# Altium PCB Glove_Row.PcbDoc (part 2 of 2)
Units mm, origin at the board's own origin, x right, y up, seen from the top; angles counter-clockwise.
Board outline 47.7 x 64 mm, 2 copper layers (Top Layer, Bottom Layer); 61 components, 194 nets, 577 pads, 247 vias.
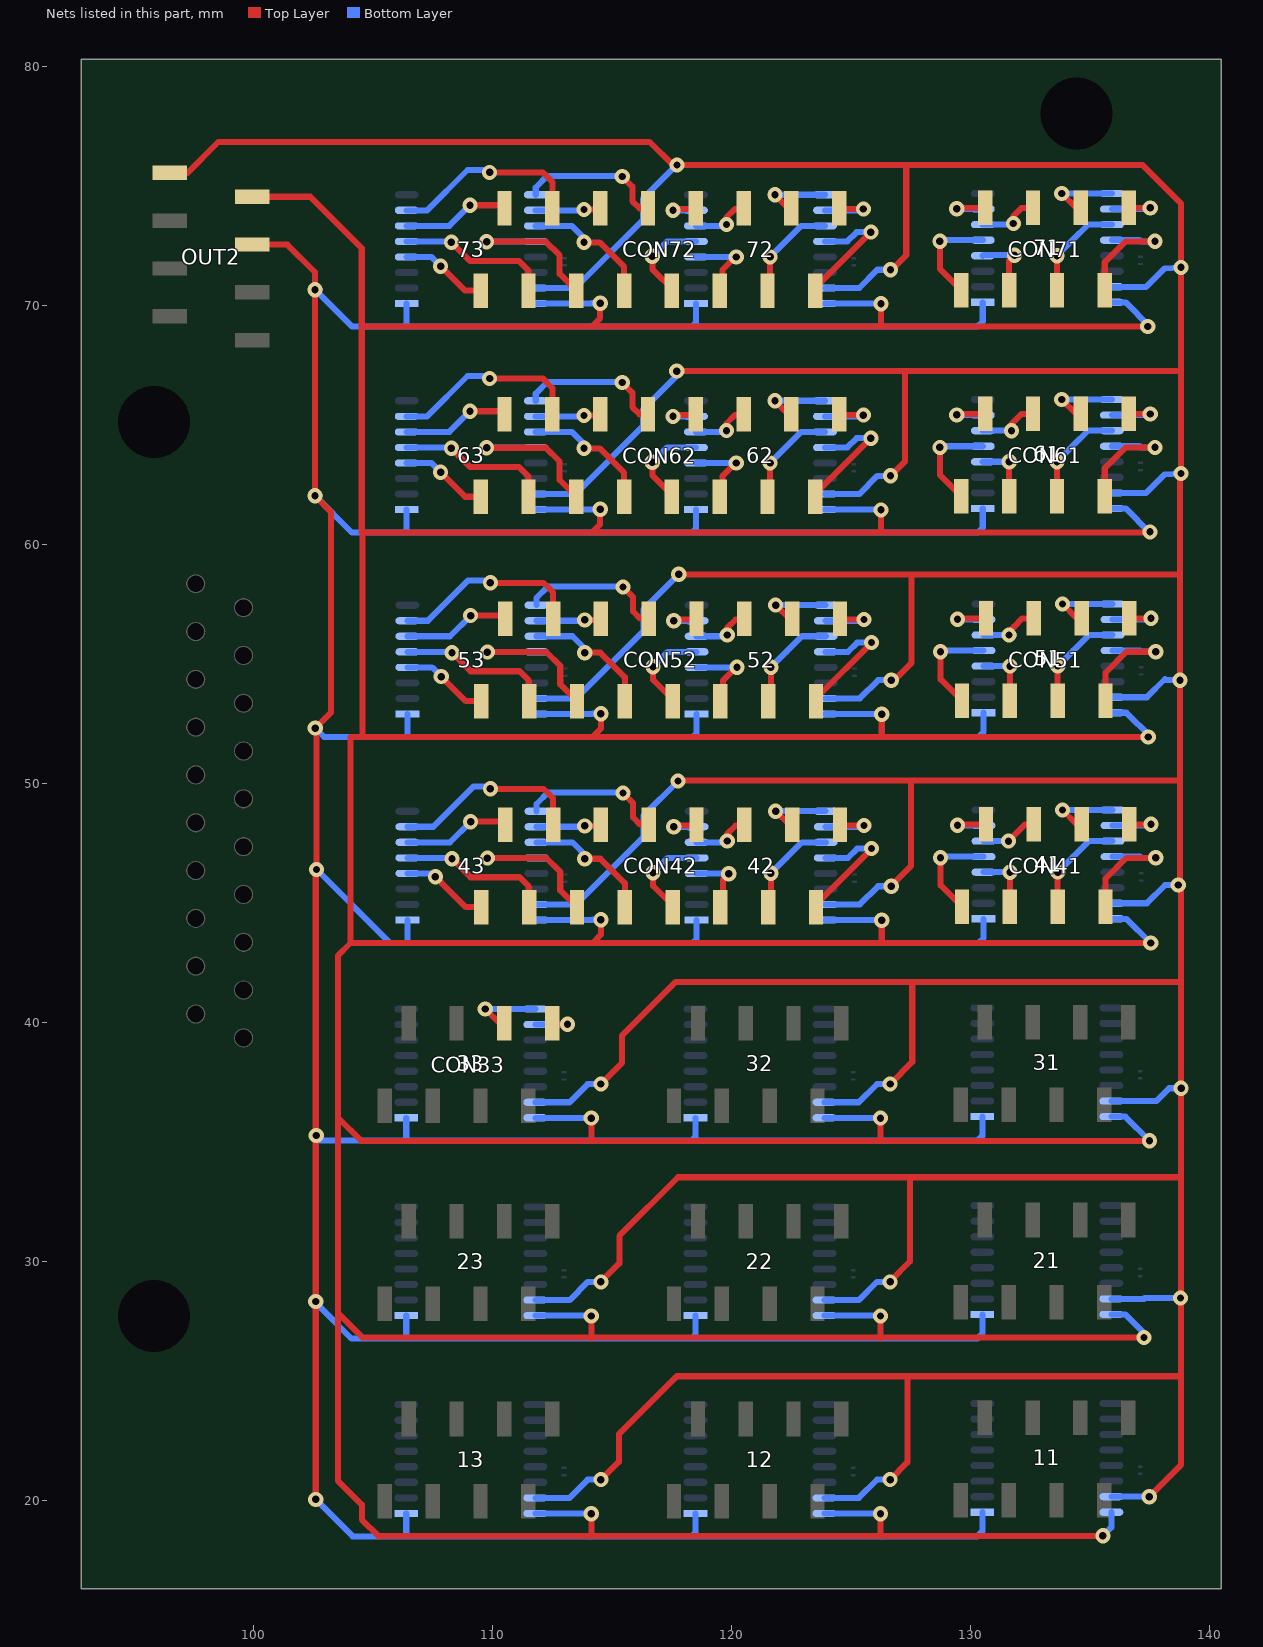
[diagram p2: the nets of this part, all layers, seen from the top]

## Via types
v1: diameter 0.635, hole 0.305, Top Layer to Bottom Layer, 247 vias

## Nets (pads, with @x,y where several pads share a name; then routed paths per layer and width w, separated by ;. In a path a pad name is that pad's centre, name@x,y a point inside that pad or via, vN(x,y) a via of type N, cw(c..) or ccw(c..) an arc to the next point about the centre after c; other vN are vias at no path point) (continued)
R337: 33.10 CON33.1 | length 2.4
  Top Layer w0.254: CON33.1@112.506,39.961 112.546,39.921 v1(113.146,39.921)
  Bottom Layer w0.254: 33.10@111.802,39.909 113.33,39.909 113.342,39.921 v1(113.146,39.921)
R338: 33.9 CON33.3 | length 3.1
  Top Layer w0.254: v1(109.706,40.561) 110.306,39.961 CON33.3@110.506,39.961
  Bottom Layer w0.254: v1(109.706,40.561) 33.9@111.8,40.561
R411: 41.4 CON41.6 | length 2.6
  Top Layer w0.254: v1@131.656,46.282 CON41.6@131.656,44.836 CON41.6@131.706,44.886
  Bottom Layer w0.254: 41.4@130.552,46.284 v1(131.658,46.284)
R412: 41.5 CON41.8 | length 4.2
  Top Layer w0.254: v1(128.756,46.886) 128.756,45.736 CON41.8@129.656,44.836
  Bottom Layer w0.254: v1(128.756,46.886) 128.804,46.934 41.5@130.552,46.934
R413: 41.6 CON41.5 | length 2.5
  Top Layer w0.254: v1@131.596,47.701 v1(131.596,47.584) 132.298,48.286 CON41.5@132.656,48.286
  Bottom Layer w0.254: 41.6@130.552,47.584 v1(131.596,47.584)
R414: 41.7 CON41.7 | length 2.3
  Top Layer w0.254: v1@129.466,48.286 CON41.7@130.656,48.286
  Bottom Layer w0.254: v1@129.466,48.234 41.7@130.552,48.234
  other v1: 129.466,48.246
R415: 41.12 CON41.2 | length 5.5
  Top Layer w0.254: CON41.2@135.656,44.836 135.656,46.016 136.526,46.886 v1(137.756,46.886)
  Bottom Layer w0.254: 41.12@135.952,46.934 137.108,46.934 137.156,46.886 v1(137.756,46.886)
R416: 41.11 CON41.4 | length 4.3
  Top Layer w0.254: CON41.4@133.656,44.836 v1(133.656,46.286)
  Bottom Layer w0.254: v1(133.656,46.286) 134.304,46.934 134.954,47.584 41.11@135.952,47.584
R417: 41.10 CON41.1 | length 2.5
  Top Layer w0.254: CON41.1@136.656,48.286 v1(137.556,48.286)
  Bottom Layer w0.254: 41.10@135.952,48.234 137.504,48.234 v1(137.556,48.286)
R418: 41.9 CON41.3 | length 3.1
  Top Layer w0.254: v1(133.856,48.886) 134.456,48.286 CON41.3@134.656,48.286
  Bottom Layer w0.254: v1(133.856,48.886) 41.9@135.952,48.884
R421: 42.4 CON42.6 | length 3
  Top Layer w0.254: CON42.6@119.706,44.836 119.656,44.786 119.656,45.981 v1(119.896,46.221)
  Bottom Layer w0.254: 42.4@118.552,46.234 118.565,46.221 v1(119.896,46.221)
R422: 42.5 CON42.8 | length 3.9
  Top Layer w0.254: v1(116.726,46.261) 116.726,45.716 CON42.8@117.656,44.786
  Bottom Layer w0.254: v1(116.726,46.261) 117.349,46.884 42.5@118.552,46.884
R423: 42.6 CON42.5 | length 2.5
  Top Layer w0.254: v1(119.831,47.586) 119.831,47.886 120.181,48.236 CON42.5@120.656,48.236
  Bottom Layer w0.254: 42.6@118.552,47.534 v1@119.831,47.534
R424: 42.7 CON42.7 | length 2.3
  Top Layer w0.254: v1@117.466,48.236 CON42.7@118.656,48.236
  Bottom Layer w0.254: v1@117.466,48.184 42.7@118.552,48.184
  other v1: 117.596,48.184
R425: 42.12 CON42.2 | length 5.5
  Top Layer w0.254: CON42.2@123.656,44.786 123.656,45.056 v1(125.871,47.271)
  Bottom Layer w0.254: 42.12@123.952,46.884 124.884,46.884 125.271,47.271 v1(125.871,47.271)
R426: 42.11 CON42.4 | length 4.3
  Top Layer w0.254: CON42.4@121.656,44.786 v1(121.656,46.236)
  Bottom Layer w0.254: v1(121.656,46.236) 122.304,46.884 122.954,47.534 42.11@123.952,47.534
R427: 42.10 CON42.1 | length 2.5
  Top Layer w0.254: CON42.1@124.656,48.236 v1(125.556,48.236)
  Bottom Layer w0.254: 42.10@123.952,48.184 125.504,48.184 v1(125.556,48.236)
R428: 42.9 CON42.3 | length 3.1
  Top Layer w0.254: v1(121.856,48.836) 122.456,48.236 CON42.3@122.656,48.236
  Bottom Layer w0.254: v1(121.856,48.836) 42.9@123.95,48.836
R431: 43.4 CON42.16 | length 3.3
  Top Layer w0.254: 107.871,45.846 108.896,44.821 CON42.16@109.546,44.821
  Bottom Layer w0.254: 43.4@106.452,46.234 107.483,46.234 v1(107.621,46.096)
R432: 43.5 CON42.14 | length 6.4
  Top Layer w0.254: v1(108.321,46.847) 109.097,46.071 111.146,46.071 111.546,45.671 CON42.14@111.546,44.821
  Bottom Layer w0.254: 43.5@106.452,46.884 108.284,46.884 v1(108.321,46.847)
R433: 43.6 CON42.15 | length 4.5
  Top Layer w0.254: v1(109.096,48.396) 110.421,48.396 CON42.15@110.546,48.271
  Bottom Layer w0.254: 43.6@106.452,47.534 108.234,47.534 v1(109.096,48.396)
R434: 43.7 CON42.13 | length 8.1
  Top Layer w0.254: v1(109.921,49.771) 112.146,49.771 112.546,49.371 CON42.13@112.546,48.271
  Bottom Layer w0.254: 43.7@106.452,48.184 107.534,48.184 109.221,49.871 109.821,49.871 v1(109.921,49.771)
R435: 43.12 CON42.12 | length 7.4
  Top Layer w0.254: v1(109.796,46.871) 112.271,46.871 112.846,46.296 112.846,45.521 CON42.12@113.546,44.821 CON42.12@113.546,45.146
  Bottom Layer w0.254: v1(109.796,46.871) 109.809,46.884 43.12@111.852,46.884
R436: 43.11 CON42.10 | length 5.7
  Top Layer w0.254: v1(113.871,46.846) 114.521,46.846 115.546,45.821 CON42.10@115.546,44.821
  Bottom Layer w0.254: 43.11@111.852,47.534 113.358,47.534 113.996,46.896 113.946,46.846 v1(113.871,46.846)
R437: 43.10 CON42.11 | length 2.7
  Top Layer w0.254: v1(113.871,48.221) 114.496,48.221 CON42.11@114.546,48.271
  Bottom Layer w0.254: 43.10@111.852,48.184 113.834,48.184 v1(113.871,48.221)
R438: 43.9 CON42.9 | length 6.1
  Top Layer w0.254: v1(115.471,49.596) 115.896,49.171 115.896,48.571 116.196,48.271 CON42.9@116.546,48.271
  Bottom Layer w0.254: 43.9@111.852,48.834 111.852,49.137 112.336,49.621 115.446,49.621 v1(115.471,49.596)
R511: 51.4 CON51.6 | length 2.6
  Top Layer w0.254: v1@131.656,54.902 CON51.6@131.656,53.456 CON51.6@131.706,53.506
  Bottom Layer w0.254: 51.4@130.552,54.904 v1(131.658,54.904)
R512: 51.5 CON51.8 | length 4.2
  Top Layer w0.254: v1(128.756,55.506) 128.756,54.356 CON51.8@129.656,53.456
  Bottom Layer w0.254: v1(128.756,55.506) 128.804,55.554 51.5@130.552,55.554
R513: 51.6 CON51.5 | length 2.7
  Top Layer w0.254: v1(131.621,56.204) 131.621,56.346 131.721,56.446 131.831,56.556 132.181,56.906 CON51.5@132.656,56.906
  Bottom Layer w0.254: 51.6@130.552,56.204 v1@131.831,56.204
R514: 51.7 CON51.7 | length 2.3
  Top Layer w0.254: v1@129.466,56.906 CON51.7@130.656,56.906
  Bottom Layer w0.254: v1@129.466,56.854 51.7@130.552,56.854
  other v1: 129.466,56.866
R515: 51.12 CON51.2 | length 5.5
  Top Layer w0.254: CON51.2@135.656,53.456 135.656,54.636 136.526,55.506 v1(137.756,55.506)
  Bottom Layer w0.254: 51.12@135.952,55.554 137.108,55.554 137.156,55.506 v1(137.756,55.506)
R516: 51.11 CON51.4 | length 4.3
  Top Layer w0.254: CON51.4@133.656,53.456 v1(133.656,54.906)
  Bottom Layer w0.254: v1(133.656,54.906) 134.304,55.554 134.954,56.204 51.11@135.952,56.204
R517: 51.10 CON51.1 | length 2.5
  Top Layer w0.254: CON51.1@136.656,56.906 v1(137.556,56.906)
  Bottom Layer w0.254: 51.10@135.952,56.854 137.504,56.854 v1(137.556,56.906)
R518: 51.9 CON51.3 | length 3.1
  Top Layer w0.254: v1(133.856,57.506) 134.456,56.906 CON51.3@134.656,56.906
  Bottom Layer w0.254: v1(133.856,57.506) 51.9@135.95,57.506
R521: 52.4 CON52.6 | length 3.5
  Top Layer w0.254: CON52.6@119.706,53.456 119.656,53.406 119.656,54.306 v1@120.221,54.871
  Bottom Layer w0.254: 52.4@118.552,54.854 v1(120.241,54.854)
R522: 52.5 CON52.8 | length 3.9
  Top Layer w0.254: v1(116.726,54.881) 116.726,54.336 CON52.8@117.656,53.406
  Bottom Layer w0.254: v1(116.726,54.881) 117.349,55.504 52.5@118.552,55.504
R523: 52.6 CON52.5 | length 2.5
  Top Layer w0.254: v1(119.831,56.206) 119.831,56.506 120.181,56.856 CON52.5@120.656,56.856
  Bottom Layer w0.254: 52.6@118.552,56.154 v1@119.831,56.154
R524: 52.7 CON52.7 | length 2.3
  Top Layer w0.254: v1@117.466,56.856 CON52.7@118.656,56.856
  Bottom Layer w0.254: v1@117.466,56.804 52.7@118.552,56.804
  other v1: 117.596,56.804
R525: 52.12 CON52.2 | length 5.5
  Top Layer w0.254: CON52.2@123.656,53.406 123.656,53.676 v1(125.871,55.891)
  Bottom Layer w0.254: 52.12@123.952,55.504 124.884,55.504 125.271,55.891 v1(125.871,55.891)
R526: 52.11 CON52.4 | length 4.3
  Top Layer w0.254: CON52.4@121.656,53.406 v1(121.656,54.856)
  Bottom Layer w0.254: v1(121.656,54.856) 122.304,55.504 122.954,56.154 52.11@123.952,56.154
R527: 52.10 CON52.1 | length 2.5
  Top Layer w0.254: CON52.1@124.656,56.856 v1(125.556,56.856)
  Bottom Layer w0.254: 52.10@123.952,56.804 125.504,56.804 v1(125.556,56.856)
R528: 52.9 CON52.3 | length 3.1
  Top Layer w0.254: v1(121.856,57.456) 122.456,56.856 CON52.3@122.656,56.856
  Bottom Layer w0.254: v1(121.856,57.456) 52.9@123.95,57.456
R531: 53.4 CON52.16 | length 3.7
  Top Layer w0.254: v1(107.871,54.466) 108.896,53.441 CON52.16@109.546,53.441
  Bottom Layer w0.254: 53.4@106.452,54.854 107.483,54.854 v1(107.871,54.466)
R532: 53.5 CON52.14 | length 6.4
  Top Layer w0.254: v1(108.321,55.467) 109.097,54.691 111.146,54.691 111.546,54.291 CON52.14@111.546,53.441
  Bottom Layer w0.254: 53.5@106.452,55.504 108.284,55.504 v1(108.321,55.467)
R533: 53.6 CON52.15 | length 4.5
  Top Layer w0.254: v1(109.096,57.016) 110.421,57.016 CON52.15@110.546,56.891
  Bottom Layer w0.254: 53.6@106.452,56.154 108.234,56.154 v1(109.096,57.016)
R534: 53.7 CON52.13 | length 8.1
  Top Layer w0.254: v1(109.921,58.391) 112.146,58.391 112.546,57.991 CON52.13@112.546,56.891
  Bottom Layer w0.254: 53.7@106.452,56.804 107.309,56.804 108.996,58.491 109.821,58.491 v1(109.921,58.391)
R535: 53.12 CON52.12 | length 7.4
  Top Layer w0.254: v1(109.796,55.491) 112.271,55.491 112.846,54.916 112.846,54.141 CON52.12@113.546,53.441 CON52.12@113.546,53.766
  Bottom Layer w0.254: v1(109.796,55.491) 109.809,55.504 53.12@111.852,55.504
R536: 53.11 CON52.10 | length 5.7
  Top Layer w0.254: v1(113.871,55.466) 114.521,55.466 115.546,54.441 CON52.10@115.546,53.441
  Bottom Layer w0.254: 53.11@111.852,56.154 113.358,56.154 113.996,55.516 113.946,55.466 v1(113.871,55.466)
R537: 53.10 CON52.11 | length 2.7
  Top Layer w0.254: v1(113.871,56.841) 114.496,56.841 CON52.11@114.546,56.891
  Bottom Layer w0.254: 53.10@111.852,56.804 113.834,56.804 v1(113.871,56.841)
R538: 53.9 CON52.9 | length 6.1
  Top Layer w0.254: v1(115.471,58.216) 115.896,57.791 115.896,57.191 116.196,56.891 CON52.9@116.546,56.891
  Bottom Layer w0.254: 53.9@111.852,57.454 111.852,57.757 112.336,58.241 115.446,58.241 v1(115.471,58.216)
R611: 61.4 CON61.6 | length 2.6
  Top Layer w0.254: v1@131.626,63.452 CON61.6@131.626,62.006 CON61.6@131.676,62.056
  Bottom Layer w0.254: 61.4@130.522,63.454 v1(131.628,63.454)
R612: 61.5 CON61.8 | length 4.2
  Top Layer w0.254: v1(128.726,64.056) 128.726,62.906 CON61.8@129.626,62.006
  Bottom Layer w0.254: v1(128.726,64.056) 128.774,64.104 61.5@130.522,64.104
R613: 61.6 CON61.5 | length 2.6
  Top Layer w0.254: v1(131.721,64.754) 131.721,65.026 131.801,65.106 132.151,65.456 CON61.5@132.626,65.456
  Bottom Layer w0.254: 61.6@130.522,64.754 v1@131.801,64.754
R614: 61.7 CON61.7 | length 2.3
  Top Layer w0.254: v1@129.436,65.456 CON61.7@130.626,65.456
  Bottom Layer w0.254: v1@129.436,65.404 61.7@130.522,65.404
  other v1: 129.436,65.416
R615: 61.12 CON61.2 | length 5.5
  Top Layer w0.254: CON61.2@135.626,62.006 135.626,63.186 136.496,64.056 v1(137.726,64.056)
  Bottom Layer w0.254: 61.12@135.922,64.104 137.078,64.104 137.126,64.056 v1(137.726,64.056)
R616: 61.11 CON61.4 | length 4.3
  Top Layer w0.254: CON61.4@133.626,62.006 v1(133.626,63.456)
  Bottom Layer w0.254: v1(133.626,63.456) 134.274,64.104 134.924,64.754 61.11@135.922,64.754
R617: 61.10 CON61.1 | length 2.5
  Top Layer w0.254: CON61.1@136.626,65.456 v1(137.526,65.456)
  Bottom Layer w0.254: 61.10@135.922,65.404 137.474,65.404 v1(137.526,65.456)
R618: 61.9 CON61.3 | length 3.1
  Top Layer w0.254: v1(133.826,66.056) 134.426,65.456 CON61.3@134.626,65.456
  Bottom Layer w0.254: v1(133.826,66.056) 61.9@135.92,66.056
R621: 62.4 CON62.6 | length 3.5
  Top Layer w0.254: CON62.6@119.676,62.006 119.626,61.956 119.626,62.851 v1@120.196,63.421
  Bottom Layer w0.254: 62.4@118.522,63.404 v1(120.211,63.404)
R622: 62.5 CON62.8 | length 3.9
  Top Layer w0.254: v1(116.696,63.431) 116.696,62.886 CON62.8@117.626,61.956
  Bottom Layer w0.254: v1(116.696,63.431) 117.319,64.054 62.5@118.522,64.054
R623: 62.6 CON62.5 | length 2.5
  Top Layer w0.254: v1(119.801,64.756) 119.801,65.056 120.151,65.406 CON62.5@120.626,65.406
  Bottom Layer w0.254: 62.6@118.522,64.704 v1@119.801,64.704
R624: 62.7 CON62.7 | length 2.3
  Top Layer w0.254: v1@117.436,65.406 CON62.7@118.626,65.406
  Bottom Layer w0.254: v1@117.436,65.354 62.7@118.522,65.354
  other v1: 117.566,65.354
R625: 62.12 CON62.2 | length 5.5
  Top Layer w0.254: CON62.2@123.626,61.956 123.626,62.226 v1(125.841,64.441)
  Bottom Layer w0.254: 62.12@123.922,64.054 124.854,64.054 125.241,64.441 v1(125.841,64.441)
R626: 62.11 CON62.4 | length 4.3
  Top Layer w0.254: CON62.4@121.626,61.956 v1(121.626,63.406)
  Bottom Layer w0.254: v1(121.626,63.406) 122.274,64.054 122.924,64.704 62.11@123.922,64.704
R627: 62.10 CON62.1 | length 2.5
  Top Layer w0.254: CON62.1@124.626,65.406 v1(125.526,65.406)
  Bottom Layer w0.254: 62.10@123.922,65.354 125.474,65.354 v1(125.526,65.406)
R628: 62.9 CON62.3 | length 3.1
  Top Layer w0.254: v1(121.826,66.006) 122.426,65.406 CON62.3@122.626,65.406
  Bottom Layer w0.254: v1(121.826,66.006) 62.9@123.92,66.006
R631: 63.4 CON62.16 | length 3.7
  Top Layer w0.254: v1(107.841,63.016) 108.866,61.991 CON62.16@109.516,61.991
  Bottom Layer w0.254: 63.4@106.422,63.404 107.453,63.404 v1(107.841,63.016)
R632: 63.5 CON62.14 | length 6.4
  Top Layer w0.254: v1(108.291,64.017) 109.067,63.241 111.116,63.241 111.516,62.841 CON62.14@111.516,61.991
  Bottom Layer w0.254: 63.5@106.422,64.054 108.254,64.054 v1(108.291,64.017)
R633: 63.6 CON62.15 | length 4.5
  Top Layer w0.254: v1(109.066,65.566) 110.391,65.566 CON62.15@110.516,65.441
  Bottom Layer w0.254: 63.6@106.422,64.704 108.204,64.704 v1(109.066,65.566)
R634: 63.7 CON62.13 | length 8.1
  Top Layer w0.254: v1(109.891,66.941) 112.116,66.941 112.516,66.541 CON62.13@112.516,65.441
  Bottom Layer w0.254: 63.7@106.422,65.354 107.279,65.354 108.966,67.041 109.791,67.041 v1(109.891,66.941)
R635: 63.12 CON62.12 | length 7.4
  Top Layer w0.254: v1(109.766,64.041) 112.241,64.041 112.816,63.466 112.816,62.691 CON62.12@113.516,61.991 CON62.12@113.516,62.316
  Bottom Layer w0.254: v1(109.766,64.041) 109.779,64.054 63.12@111.822,64.054
R636: 63.11 CON62.10 | length 5.7
  Top Layer w0.254: v1(113.841,64.016) 114.491,64.016 115.516,62.991 CON62.10@115.516,61.991
  Bottom Layer w0.254: 63.11@111.822,64.704 113.328,64.704 113.966,64.066 113.916,64.016 v1(113.841,64.016)
R637: 63.10 CON62.11 | length 2.7
  Top Layer w0.254: v1(113.841,65.391) 114.466,65.391 CON62.11@114.516,65.441
  Bottom Layer w0.254: 63.10@111.822,65.354 113.804,65.354 v1(113.841,65.391)
R638: 63.9 CON62.9 | length 6.1
  Top Layer w0.254: v1(115.441,66.766) 115.866,66.341 115.866,65.741 116.166,65.441 CON62.9@116.516,65.441
  Bottom Layer w0.254: 63.9@111.822,66.004 111.822,66.307 112.306,66.791 115.416,66.791 v1(115.441,66.766)
R711: 71.4 CON71.6 | length 3
  Top Layer w0.254: CON71.6@131.676,70.676 CON71.6@131.626,70.626 131.626,71.876 v1(131.846,72.096)
  Bottom Layer w0.254: 71.4@130.522,72.074 130.544,72.096 v1(131.846,72.096)
R712: 71.5 CON71.8 | length 4.2
  Top Layer w0.254: v1(128.726,72.676) 128.726,71.526 CON71.8@129.626,70.626
  Bottom Layer w0.254: v1(128.726,72.676) 128.774,72.724 71.5@130.522,72.724
R713: 71.6 CON71.5 | length 2.5
  Top Layer w0.254: v1(131.801,73.426) 131.801,73.726 132.151,74.076 CON71.5@132.626,74.076
  Bottom Layer w0.254: 71.6@130.522,73.374 v1@131.801,73.374
R714: 71.7 CON71.7 | length 2.3
  Top Layer w0.254: v1@129.436,74.076 CON71.7@130.626,74.076
  Bottom Layer w0.254: v1@129.436,74.024 71.7@130.522,74.024
  other v1: 129.436,74.036
R715: 71.12 CON71.2 | length 5.5
  Top Layer w0.254: CON71.2@135.626,70.626 135.626,71.806 136.496,72.676 v1(137.726,72.676)
  Bottom Layer w0.254: 71.12@135.922,72.724 137.078,72.724 137.126,72.676 v1(137.726,72.676)
R716: 71.11 CON71.4 | length 4.3
  Top Layer w0.254: CON71.4@133.626,70.626 v1(133.626,72.076)
  Bottom Layer w0.254: v1(133.626,72.076) 134.274,72.724 134.924,73.374 71.11@135.922,73.374
R717: 71.10 CON71.1 | length 2.5
  Top Layer w0.254: CON71.1@136.626,74.076 v1(137.526,74.076)
  Bottom Layer w0.254: 71.10@135.922,74.024 137.474,74.024 v1(137.526,74.076)
R718: 71.9 CON71.3 | length 3.1
  Top Layer w0.254: v1(133.826,74.676) 134.426,74.076 CON71.3@134.626,74.076
  Bottom Layer w0.254: v1(133.826,74.676) 71.9@135.92,74.676
R721: 72.4 CON72.6 | length 3.5
  Top Layer w0.254: CON72.6@119.676,70.626 119.626,70.576 119.626,71.476 v1@120.196,72.046
  Bottom Layer w0.254: 72.4@118.522,72.024 v1(120.211,72.024)
R722: 72.5 CON72.8 | length 3.9
  Top Layer w0.254: v1(116.696,72.051) 116.696,71.506 CON72.8@117.626,70.576
  Bottom Layer w0.254: v1(116.696,72.051) 117.319,72.674 72.5@118.522,72.674
R723: 72.6 CON72.5 | length 2.5
  Top Layer w0.254: v1(119.801,73.376) 119.801,73.676 120.151,74.026 CON72.5@120.626,74.026
  Bottom Layer w0.254: 72.6@118.522,73.324 v1@119.801,73.324
R724: 72.7 CON72.7 | length 2.3
  Top Layer w0.254: v1@117.436,74.026 CON72.7@118.626,74.026
  Bottom Layer w0.254: v1@117.436,73.974 72.7@118.522,73.974
  other v1: 117.566,73.974
R725: 72.12 CON72.2 | length 5.5
  Top Layer w0.254: CON72.2@123.626,70.576 123.626,70.846 v1(125.841,73.061)
  Bottom Layer w0.254: 72.12@123.922,72.674 124.854,72.674 125.241,73.061 v1(125.841,73.061)
R726: 72.11 CON72.4 | length 4.3
  Top Layer w0.254: CON72.4@121.626,70.576 v1(121.626,72.026)
  Bottom Layer w0.254: v1(121.626,72.026) 122.274,72.674 122.924,73.324 72.11@123.922,73.324
R727: 72.10 CON72.1 | length 2.5
  Top Layer w0.254: CON72.1@124.626,74.026 v1(125.526,74.026)
  Bottom Layer w0.254: 72.10@123.922,73.974 125.474,73.974 v1(125.526,74.026)
R728: 72.9 CON72.3 | length 3.1
  Top Layer w0.254: v1(121.826,74.626) 122.426,74.026 CON72.3@122.626,74.026
  Bottom Layer w0.254: v1(121.826,74.626) 72.9@123.92,74.626
R731: 73.4 CON72.16 | length 3.7
  Top Layer w0.254: v1(107.841,71.636) 108.866,70.611 CON72.16@109.516,70.611
  Bottom Layer w0.254: 73.4@106.422,72.024 107.453,72.024 v1(107.841,71.636)
R732: 73.5 CON72.14 | length 6.4
  Top Layer w0.254: v1(108.291,72.637) 109.067,71.861 111.116,71.861 111.516,71.461 CON72.14@111.516,70.611
  Bottom Layer w0.254: 73.5@106.422,72.674 108.254,72.674 v1(108.291,72.637)
R733: 73.6 CON72.15 | length 4.5
  Top Layer w0.254: v1(109.066,74.186) 110.391,74.186 CON72.15@110.516,74.061
  Bottom Layer w0.254: 73.6@106.422,73.324 108.204,73.324 v1(109.066,74.186)
R734: 73.7 CON72.13 | length 8.1
  Top Layer w0.254: v1(109.891,75.561) 112.116,75.561 112.516,75.161 CON72.13@112.516,74.061
  Bottom Layer w0.254: 73.7@106.422,73.974 107.279,73.974 108.966,75.661 109.791,75.661 v1(109.891,75.561)
R735: 73.12 CON72.12 | length 7.4
  Top Layer w0.254: v1(109.766,72.661) 112.241,72.661 112.816,72.086 112.816,71.311 CON72.12@113.516,70.611 CON72.12@113.516,70.936
  Bottom Layer w0.254: v1(109.766,72.661) 109.779,72.674 73.12@111.822,72.674
R736: 73.11 CON72.10 | length 5.7
  Top Layer w0.254: v1(113.841,72.636) 114.491,72.636 115.516,71.611 CON72.10@115.516,70.611
  Bottom Layer w0.254: 73.11@111.822,73.324 113.328,73.324 113.966,72.686 113.916,72.636 v1(113.841,72.636)
R737: 73.10 CON72.11 | length 2.7
  Top Layer w0.254: v1(113.841,74.011) 114.466,74.011 CON72.11@114.516,74.061
  Bottom Layer w0.254: 73.10@111.822,73.974 113.804,73.974 v1(113.841,74.011)
R738: 73.9 CON72.9 | length 6.1
  Top Layer w0.254: v1(115.441,75.386) 115.866,74.961 115.866,74.361 116.166,74.061 CON72.9@116.516,74.061
  Bottom Layer w0.254: 73.9@111.822,74.624 111.822,74.927 112.306,75.411 115.416,75.411 v1(115.441,75.386)
SEL0: 11.1 12.1 13.1 21.1 22.1 23.1 31.1 32.1 33.1 41.1 42.1 43.1 51.1 52.1 53.1 61.1 62.1 63.1 71.1 72.1 73.1 OUT2.5 | length 274.3
  Top Layer w0.254: OUT2.5@99.966,72.541 101.426,72.541 102.586,71.381 v1(102.586,70.651) v1(102.586,62.031) 103.246,61.371 103.246,52.961 v1(102.596,52.311) ; v1(102.616,20.046) v1(102.616,28.321) v1@102.616,35.271 ; v1@102.616,46.396 102.616,35.346 v1@102.691,35.271 ; v1(102.646,46.396) v1@102.646,52.261
  Bottom Layer w0.254: v1(102.586,62.031) v1@102.596,62.031 ; v1(102.586,70.651) v1@102.596,70.651 ; v1@102.591,28.296 104.111,26.776 130.296,26.776 130.502,26.982 21.1@130.502,27.784 ; v1@102.591,62.036 v1@102.596,62.031 ; v1@102.591,70.656 v1@102.596,70.651 ; v1(102.596,52.311) 102.961,51.946 118.396,51.946 ; v1(102.616,28.321) v1@102.766,28.321 ; v1@102.616,35.051 130.296,35.051 130.502,35.257 31.1@130.502,36.059 ; v1(102.646,46.396) 102.651,46.396 105.721,43.326 130.346,43.326 130.552,43.532 41.1@130.552,44.334 ; v1@102.691,35.271 102.911,35.051 ; v1@102.766,20.046 v1(102.616,20.046) 104.161,18.501 130.296,18.501 130.502,18.707 11.1@130.502,19.509 ; v1@102.786,62.041 v1@102.596,62.031 ; v1@102.786,70.661 v1@102.596,70.651 ; 106.402,18.657 13.1@106.402,19.459 ; 106.402,26.932 23.1@106.402,27.734 ; 106.402,35.207 33.1@106.402,36.009 ; 106.422,60.652 63.1@106.422,61.454 ; 106.422,69.272 73.1@106.422,70.074 ; 106.452,43.482 43.1@106.452,44.284 ; 106.452,52.102 53.1@106.452,52.904 ; 118.346,18.501 118.502,18.657 12.1@118.502,19.459 ; 118.346,26.776 118.502,26.932 22.1@118.502,27.734 ; 118.346,35.051 118.502,35.207 32.1@118.502,36.009 ; 118.366,60.496 118.522,60.652 62.1@118.522,61.454 ; 118.366,69.116 118.522,69.272 72.1@118.522,70.074 ; 118.396,43.326 118.552,43.482 42.1@118.552,44.284 ; 52.1@118.552,52.904 118.552,52.102 118.396,51.946 ; 61.1@130.522,61.504 130.522,60.702 130.316,60.496 104.131,60.496 v1@102.596,62.031 ; 71.1@130.522,70.124 130.522,69.322 130.316,69.116 104.131,69.116 v1@102.596,70.651 ; 51.1@130.552,52.954 130.552,52.152 130.346,51.946 118.396,51.946
  other v1: 102.641,35.271
SEL1: 11.16 12.16 13.16 21.16 22.16 23.16 31.16 32.16 33.16 41.16 42.16 43.16 51.16 52.16 53.16 61.16 62.16 63.16 71.16 72.16 73.16 OUT2.7 | length 353.3
  Top Layer w0.254: OUT2.7@99.966,74.541 102.386,74.541 104.541,72.386 104.541,69.111 ; 103.636,27.756 104.571,26.821 v1(137.271,26.821) ; 104.571,51.941 104.571,60.461 ; 114.146,18.496 v1(114.146,19.446) ; 114.146,26.771 v1(114.146,27.721) ; v1(114.146,35.996) 114.146,35.046 ; v1(114.516,61.466) 114.516,60.841 114.166,60.491 ; v1(114.516,70.086) 114.516,69.461 114.166,69.111 ; v1(114.546,44.296) 114.546,43.671 114.196,43.321 ; v1(114.546,52.916) 114.546,52.291 114.196,51.941 ; 126.246,18.496 v1(126.246,19.446) ; 126.246,26.771 v1(126.246,27.721) ; v1(126.246,35.996) 126.246,35.046 ; v1(126.266,61.441) 126.266,60.491 ; v1(126.266,70.061) 126.266,69.111 ; v1(126.296,44.271) 126.296,43.321 ; v1(126.296,52.891) 126.296,51.941 ; v1(135.546,18.521) 105.271,18.521 105.246,18.496 104.546,19.196 104.546,19.821 103.546,20.821 103.546,36.021 ; v1(137.421,69.111) 126.266,69.111 ; v1(137.446,51.941) 126.296,51.941 ; v1(137.496,35.046) 126.246,35.046 ; v1(137.521,60.521) 137.491,60.491 126.266,60.491 ; v1(137.546,43.321) 126.296,43.321 ; 103.546,36.021 104.521,35.046 114.146,35.046 ; 103.546,36.021 103.546,42.796 104.071,43.321 ; 104.071,43.321 114.196,43.321 ; 104.071,43.321 104.071,51.941 114.196,51.941 ; 104.541,69.111 114.166,69.111 ; 104.541,69.111 104.541,60.491 114.166,60.491 ; 114.146,35.046 126.246,35.046 ; 114.166,60.491 126.266,60.491 ; 114.166,69.111 126.266,69.111 ; 114.196,43.321 126.296,43.321 ; 114.196,51.941 126.296,51.941
  Bottom Layer w0.254: 13.16@111.802,19.459 114.133,19.459 v1(114.146,19.446) ; 23.16@111.802,27.734 114.133,27.734 v1(114.146,27.721) ; 33.16@111.802,36.009 114.133,36.009 v1(114.146,35.996) ; 63.16@111.822,61.454 114.153,61.454 114.165,61.466 v1(114.516,61.466) ; 73.16@111.822,70.074 114.153,70.074 114.165,70.086 v1(114.516,70.086) ; 43.16@111.852,44.284 114.183,44.284 114.195,44.296 v1(114.546,44.296) ; 53.16@111.852,52.904 114.183,52.904 114.195,52.916 v1(114.546,52.916) ; 12.16@123.902,19.459 126.233,19.459 v1(126.246,19.446) ; 22.16@123.902,27.734 126.233,27.734 v1(126.246,27.721) ; 32.16@123.902,36.009 126.233,36.009 v1(126.246,35.996) ; 62.16@123.922,61.454 126.253,61.454 v1(126.266,61.441) ; 72.16@123.922,70.074 126.253,70.074 v1(126.266,70.061) ; 42.16@123.952,44.284 126.283,44.284 v1(126.296,44.271) ; 52.16@123.952,52.904 126.283,52.904 v1(126.296,52.891) ; v1(135.546,18.521) 135.902,18.877 11.16@135.902,19.509 ; 21.16@135.902,27.784 136.483,27.784 137.359,26.909 v1(137.271,26.821) ; 31.16@135.902,36.059 136.483,36.059 v1(137.496,35.046) ; 61.16@135.922,61.504 136.503,61.504 137.516,60.491 137.521,60.496 v1(137.521,60.521) ; 71.16@135.922,70.124 136.503,70.124 137.516,69.111 v1(137.421,69.111) ; 41.16@135.952,44.334 136.533,44.334 v1(137.546,43.321) ; 51.16@135.952,52.954 136.533,52.954 137.546,51.941 v1(137.446,51.941)
SEL2: 11.15 12.15 13.15 21.15 22.15 23.15 31.15 32.15 33.15 41.15 42.15 43.15 51.15 52.15 53.15 61.15 62.15 63.15 71.15 72.15 73.15 OUT2.8 | length 362.5
  Top Layer w0.254: OUT2.8@96.516,75.541 97.256,75.541 98.546,76.831 116.586,76.831 117.546,75.871 127.321,75.871 ; v1(114.546,20.871) 115.296,21.621 115.296,22.771 117.721,25.196 138.821,25.196 ; v1(114.546,29.146) 115.321,29.921 115.321,31.071 117.771,33.521 127.471,33.521 ; v1(114.546,37.421) 115.421,38.296 115.421,39.446 117.671,41.696 126.596,41.696 ; v1(117.721,67.246) 126.646,67.246 ; v1(117.771,50.096) 117.796,50.121 126.721,50.121 ; v1@117.884,58.663 v1(117.801,58.746) 126.746,58.746 ; v1(126.646,20.871) 127.371,21.596 127.371,25.196 ; v1(126.646,29.146) 126.646,29.171 127.471,29.996 127.471,33.521 ; v1(126.646,37.421) 127.571,38.346 127.571,41.696 126.596,41.696 ; v1(126.666,62.866) 127.271,63.471 127.271,67.246 126.646,67.246 ; v1(126.666,71.486) 126.711,71.486 127.321,72.096 127.321,75.871 ; v1(126.696,45.696) 126.696,45.721 127.521,46.546 127.521,50.096 127.496,50.121 126.721,50.121 ; v1@126.816,54.316 127.546,55.046 127.546,58.746 126.746,58.746 ; v1(137.484,20.159) 138.821,21.496 v1(138.821,37.246) v1@138.821,45.521 ; 138.616,67.246 126.646,67.246 ; 138.746,50.121 126.721,50.121 ; 138.746,58.746 126.746,58.746 ; v1@138.771,45.696 v1(138.771,54.316) 138.771,62.811 v1(138.816,62.966) v1(138.816,71.586) 138.816,74.251 137.196,75.871 127.321,75.871 ; 138.821,33.521 127.471,33.521 ; 138.821,41.696 126.596,41.696
  Bottom Layer w0.254: 13.15@111.802,20.109 113.234,20.109 113.996,20.871 v1(114.546,20.871) ; 23.15@111.802,28.384 113.234,28.384 113.996,29.146 v1(114.546,29.146) ; 33.15@111.802,36.659 113.234,36.659 113.996,37.421 v1(114.546,37.421) ; 63.15@111.822,62.104 113.479,62.104 116.306,64.931 116.306,65.631 117.721,67.046 v1(117.721,67.246) ; 73.15@111.822,70.724 113.479,70.724 116.306,73.551 116.306,74.451 v1(117.728,75.873) ; 43.15@111.852,44.934 113.509,44.934 116.336,47.761 116.336,48.661 v1(117.771,50.096) ; 53.15@111.852,53.554 113.509,53.554 116.336,56.381 116.336,57.281 v1(117.801,58.746) ; 12.15@123.902,20.109 125.334,20.109 126.096,20.871 v1(126.646,20.871) ; 22.15@123.902,28.384 125.334,28.384 126.096,29.146 v1(126.646,29.146) ; 32.15@123.902,36.659 125.334,36.659 126.096,37.421 v1(126.646,37.421) ; 62.15@123.922,62.104 125.354,62.104 126.116,62.866 v1(126.666,62.866) ; 72.15@123.922,70.724 125.354,70.724 126.116,71.486 v1(126.666,71.486) ; 42.15@123.952,44.934 125.384,44.934 126.146,45.696 v1(126.696,45.696) ; 52.15@123.952,53.554 125.384,53.554 126.146,54.316 v1(126.696,54.316) ; 11.15@135.902,20.159 v1(137.484,20.159) ; 21.15@135.902,28.434 137.26,28.434 ; 31.15@135.902,36.709 137.784,36.709 138.321,37.246 v1(138.821,37.246) ; 61.15@135.922,62.154 137.354,62.154 138.116,62.916 v1(138.816,62.966) ; 71.15@135.922,70.774 137.354,70.774 138.116,71.536 v1(138.816,71.586) ; 41.15@135.952,44.984 137.384,44.984 138.146,45.746 v1(138.696,45.746) ; 51.15@135.952,53.604 137.384,53.604 138.146,54.366 138.196,54.316 v1(138.771,54.316) ; 137.297,28.471 v1@138.646,28.471
  other v1: 138.796,28.471
pads on no net: OUT1.13 OUT1.14

## Polygon pours and split planes (outlines as drawn)
GND on Top Layer "Top_GND" (solid, remove dead copper, pour order 2): 94.546,21.421 94.546,75.821 97.606,78.881 135.786,78.881 139.671,74.996 139.671,21.246 135.746,17.321 98.646,17.321
GND on Bottom Layer "Bottom_GND" (solid, remove dead copper, pour order 4): 97.606,78.881 135.786,78.881 139.671,74.996 139.671,21.246 135.746,17.321 98.646,17.321 94.546,21.421 94.546,75.821

## Keep-outs
Keep-Out Layer:
  lines w0.254: 93.846,20.821 ccw(c97.946,20.821) 97.946,16.721 135.246,16.721 ccw(c135.246,21.721) 140.246,21.721 140.246,74.521 ccw(c135.046,74.521) 135.046,79.721 98.346,79.721 ccw(c98.346,75.221) 93.846,75.221 93.846,20.821

## Silkscreen, mask and mechanical layers (free items; w line width, h text height)
Top Overlay:
  text "Sameer" at 104.646,77.321 h1.52
  text "Inderjot" at 121.146,77.121 h1.52
  text "SINAPSE" at 100.146,23.721 h2 r90
Bottom Overlay:
  text "Tactile Glove-Row" at 96.246,60.121 h1.52 r90

## Dimensions
92.8,80.3 to 92.8,16.3 on Top Overlay
92.8,16.3 to 140.5,16.3 on Top Overlay